# EAGLE board CPC_6502_V1.00 (EAGLE 6.4)
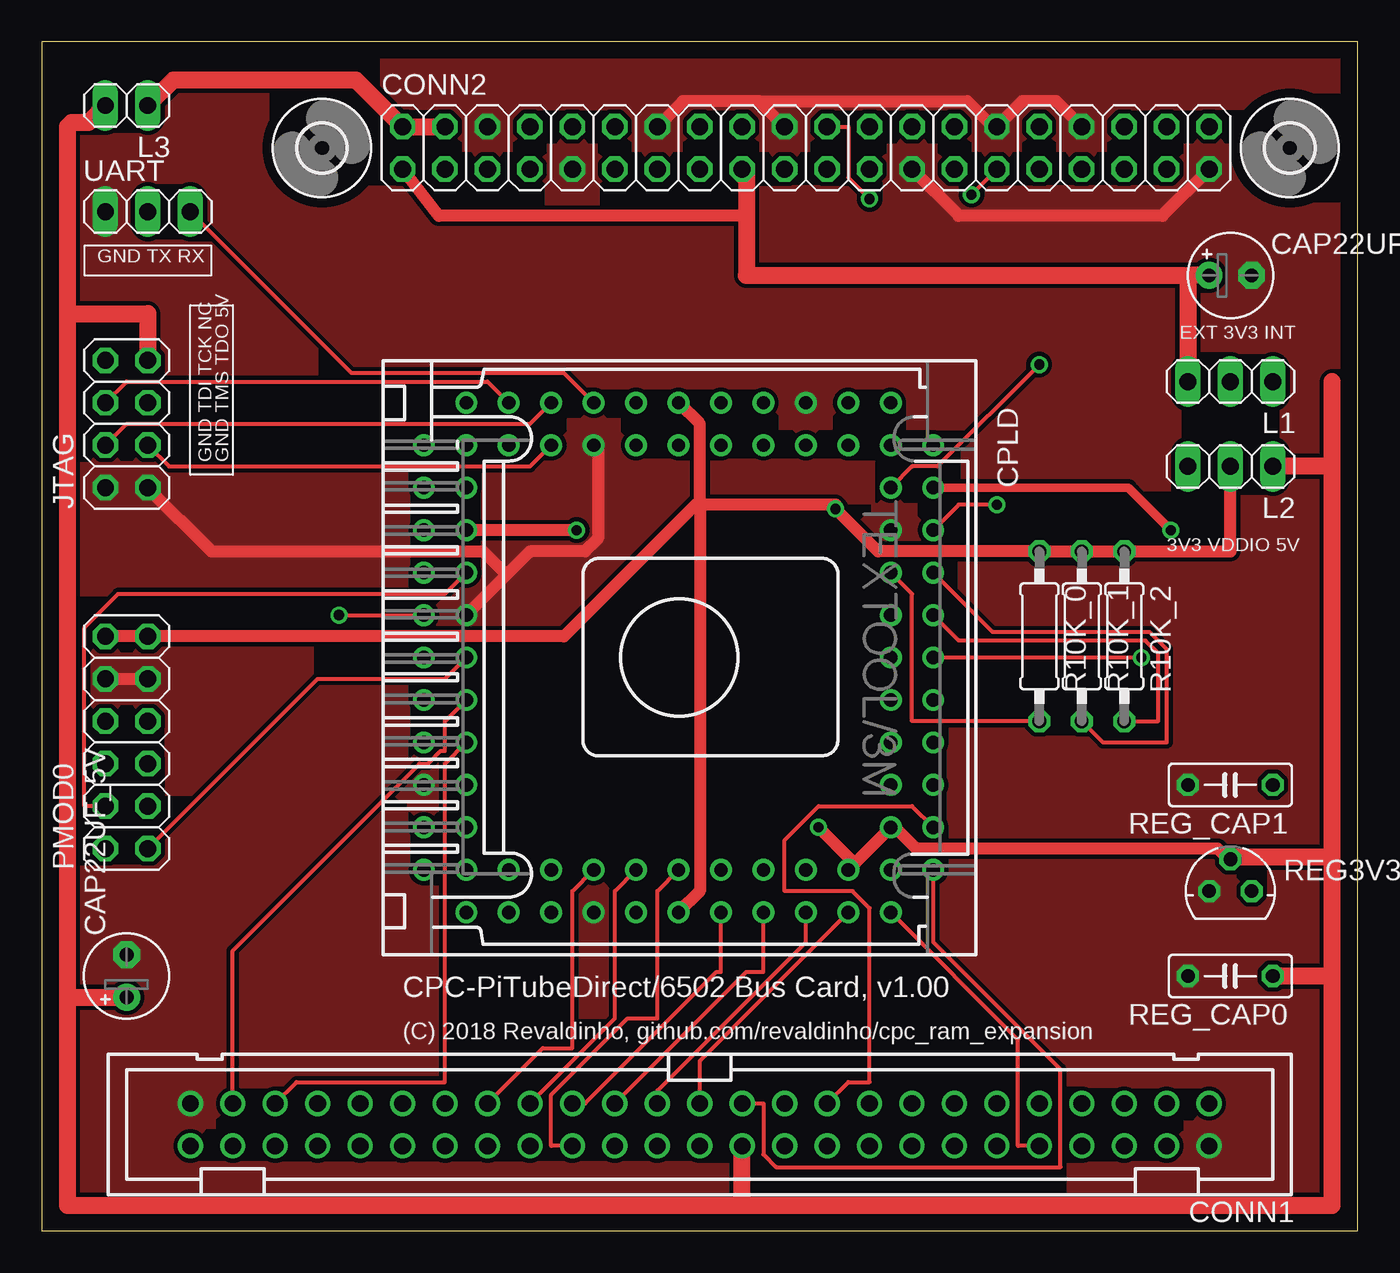
[diagram p0: board, top side]
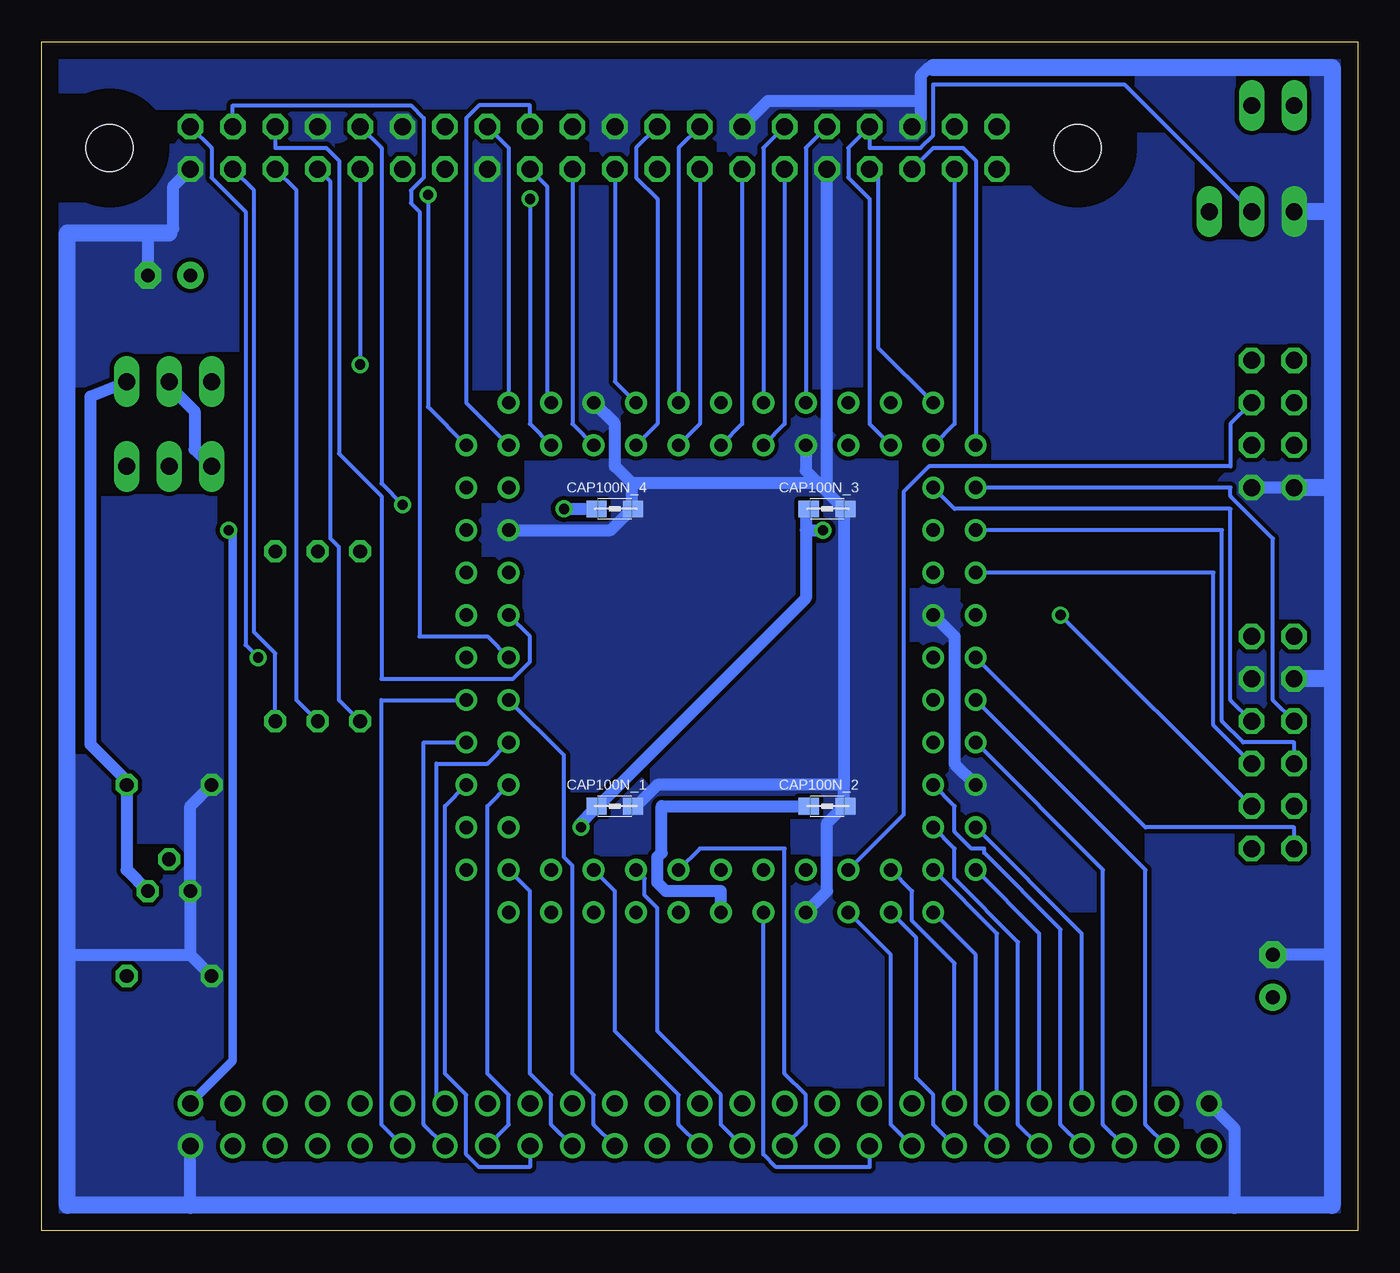
[diagram p1: board, bottom side, seen from below]

Size 78.74 x 71.12 mm. Coordinates in mm from the lower left corner, seen from the top.
Outline: 0,0 78.74,0 78.74,71.12 0,71.12 0,0
Copper layers (1*16): Top 0.035mm / dielectric 1.5mm / Bottom 0.035mm
Design rules "default": minimum track width 10mil, minimum drill 24mil, track to track 8mil, track to pad 8mil, pad to pad 8mil, via to via 8mil, smd to smd 8mil, copper to edge 40mil, drill to drill 8mil, minimum pad ring 10mil, minimum via ring 8mil, stop-mask expansion 4mil, vias tented up to drill 0mil, thermal gap 10mil
Net classes: 0 signal: width 0.254 mm, clearance 0.254 mm; 1 supply: width 0.711 mm, clearance 0.254 mm

## Footprints (pad centres in the part's own frame; a part is rotated, then mirrored left to right if it is on the bottom)
E2,5-5 = drill 0.813 pad 1.6: + -1.27,0 | drill 0.813 pad 1.6 octagon: - 1.27,0
0805 = smd 1.2 x 1: 1 -1.1,0; 2 1.1,0
PAK100/2500-50 = drill 1 pad 1.422: 1 -30.48,-1.27; 2 -30.48,1.27; 3 -27.94,-1.27; 4 -27.94,1.27; 5 -25.4,-1.27; 6 -25.4,1.27; 7 -22.86,-1.27; 8 -22.86,1.27; 9 -20.32,-1.27; 10 -20.32,1.27; 11 -17.78,-1.27; 12 -17.78,1.27; 13 -15.24,-1.27; 14 -15.24,1.27; 15 -12.7,-1.27; 16 -12.7,1.27; 17 -10.16,-1.27; 18 -10.16,1.27; 19 -7.62,-1.27; 20 -7.62,1.27; 21 -5.08,-1.27; 22 -5.08,1.27; 23 -2.54,-1.27; 24 -2.54,1.27; 25 0,-1.27; 26 0,1.27; 27 2.54,-1.27; 28 2.54,1.27; 29 5.08,-1.27; 30 5.08,1.27; 31 7.62,-1.27; 32 7.62,1.27; 33 10.16,-1.27; 34 10.16,1.27; 35 12.7,-1.27; 36 12.7,1.27; 37 15.24,-1.27; 38 15.24,1.27; 39 17.78,-1.27; 40 17.78,1.27; 41 20.32,-1.27; 42 20.32,1.27; 43 22.86,-1.27; 44 22.86,1.27; 45 25.4,-1.27; 46 25.4,1.27; 47 27.94,-1.27; 48 27.94,1.27; 49 30.48,-1.27; 50 30.48,1.27
2X20 = drill 1.016 octagon: 1 -24.13,-1.27; 2 -24.13,1.27; 3 -21.59,-1.27; 4 -21.59,1.27; 5 -19.05,-1.27; 6 -19.05,1.27; 7 -16.51,-1.27; 8 -16.51,1.27; 9 -13.97,-1.27; 10 -13.97,1.27; 11 -11.43,-1.27; 12 -11.43,1.27; 13 -8.89,-1.27; 14 -8.89,1.27; 15 -6.35,-1.27; 16 -6.35,1.27; 17 -3.81,-1.27; 18 -3.81,1.27; 19 -1.27,-1.27; 20 -1.27,1.27; 21 1.27,-1.27; 22 1.27,1.27; 23 3.81,-1.27; 24 3.81,1.27; 25 6.35,-1.27; 26 6.35,1.27; 27 8.89,-1.27; 28 8.89,1.27; 29 11.43,-1.27; 30 11.43,1.27; 31 13.97,-1.27; 32 13.97,1.27; 33 16.51,-1.27; 34 16.51,1.27; 35 19.05,-1.27; 36 19.05,1.27; 37 21.59,-1.27; 38 21.59,1.27; 39 24.13,-1.27; 40 24.13,1.27
284-1273-00-1102JH = drill 0.8 pad 1.27: 1 15.24,0; 2 12.7,0; 3 15.24,2.54; 4 12.7,2.54; 5 15.24,5.08; 6 12.7,5.08; 7 15.24,7.62; 8 12.7,7.62; 9 15.24,10.16; 10 12.7,10.16; 11 15.24,12.7; 12 12.7,15.24; 13 12.7,12.7; 14 10.16,15.24; 15 10.16,12.7; 16 7.62,15.24; 17 7.62,12.7; 18 5.08,15.24; 19 5.08,12.7; 20 2.54,15.24; 21 2.54,12.7; 22 0,15.24; 23 0,12.7; 24 -2.54,15.24; 25 -2.54,12.7; 26 -5.08,15.24; 27 -5.08,12.7; 28 -7.62,15.24; 29 -7.62,12.7; 30 -10.16,15.24; 31 -10.16,12.7; 32 -12.7,15.24; 33 -15.24,12.7; 34 -12.7,12.7; 35 -15.24,10.16; 36 -12.7,10.16; 37 -15.24,7.62; 38 -12.7,7.62; 39 -15.24,5.08; 40 -12.7,5.08; 41 -15.24,2.54; 42 -12.7,2.54; 43 -15.24,0; 44 -12.7,0; 45 -15.24,-2.54; 46 -12.7,-2.54; 47 -15.24,-5.08; 48 -12.7,-5.08; 49 -15.24,-7.62; 50 -12.7,-7.62; 51 -15.24,-10.16; 52 -12.7,-10.16; 53 -15.24,-12.7; 54 -12.7,-15.24; 55 -12.7,-12.7; 56 -10.16,-15.24; 57 -10.16,-12.7; 58 -7.62,-15.24; 59 -7.62,-12.7; 60 -5.08,-15.24; 61 -5.08,-12.7; 62 -2.54,-15.24; 63 -2.54,-12.7; 64 0,-15.24; 65 0,-12.7; 66 2.54,-15.24; 67 2.54,-12.7; 68 5.08,-15.24; 69 5.08,-12.7; 70 7.62,-15.24; 71 7.62,-12.7; 72 10.16,-15.24; 73 10.16,-12.7; 74 12.7,-15.24; 75 15.24,-12.7; 76 12.7,-12.7; 77 15.24,-10.16; 78 12.7,-10.16; 79 15.24,-7.62; 80 12.7,-7.62; 81 15.24,-5.08; 82 12.7,-5.08; 83 15.24,-2.54; 84 12.7,-2.54
2,8 = hole 2.8: 0,0
2X04 = drill 1.016 octagon: 1 -3.81,-1.27; 2 -3.81,1.27; 3 -1.27,-1.27; 4 -1.27,1.27; 5 1.27,-1.27; 6 1.27,1.27; 7 3.81,-1.27; 8 3.81,1.27
1X03 = drill 1.016 long: 1 -2.54,0; 2 0,0; 3 2.54,0
1X02 = drill 1.016 long: 1 -1.27,0; 2 1.27,0
2X06 = drill 1.016 octagon: 1 -6.35,-1.27; 2 -6.35,1.27; 3 -3.81,-1.27; 4 -3.81,1.27; 5 -1.27,-1.27; 6 -1.27,1.27; 7 1.27,-1.27; 8 1.27,1.27; 9 3.81,-1.27; 10 3.81,1.27; 11 6.35,-1.27; 12 6.35,1.27
0207/10 = drill 0.813 octagon: 1 -5.08,0; 2 5.08,0
TO92-3 = drill 0.813 octagon: A1 -1.27,0; A2 1.27,0; G 0,1.905
C050-025X075 = drill 0.813 octagon: 1 -2.54,0; 2 2.54,0

## Placement (x,y rotation side)
CAP22UF_5V  [E2,5-5]  5.08,15.24 90 top
CAP22UF_IO  [E2,5-5]  71.12,57.15 0 top
CAP100N_1  [0805]  44.45,25.4 180 bottom
CAP100N_2  [0805]  31.75,25.4 180 bottom
CAP100N_3  [0805]  31.75,43.18 180 bottom
CAP100N_4  [0805]  44.45,43.18 180 bottom
CONN1  [PAK100/2500-50]  39.37,6.35 180 top
CONN2  [2X20]  45.72,64.77 0 top
CPLD  [284-1273-00-1102JH]  38.1,34.29 0 top
H1  [2,8]  74.68,64.77 0 top
H2  [2,8]  16.76,64.77 0 top
JTAG  [2X04]  5.08,48.26 90 top
L1  [1X03]  71.12,50.8 180 top
L2  [1X03]  71.12,45.72 180 top
L3  [1X02]  5.08,67.31 180 top
PMOD0  [2X06]  5.08,29.21 90 top
R10K_0  [0207/10]  59.69,35.56 270 top
R10K_1  [0207/10]  62.23,35.56 270 top
R10K_2  [0207/10]  64.77,35.56 270 top
REG3V3  [TO92-3]  71.12,20.32 0 top
REG_CAP0  [C050-025X075]  71.12,15.24 180 top
REG_CAP1  [C050-025X075]  71.12,26.67 180 top
UART  [1X03]  6.35,60.96 0 top

## Library data of the parts
CAP22UF_5V CAP22UF_IO R10K_0 R10K_1 R10K_2 REG_CAP0 REG_CAP1 = resistor
CAP100N_1-CAP100N_4 = wuerth-elektronik
CONN1 CPLD = con-3m
CONN2 JTAG L1-L3 PMOD0 UART = pinhead
H1 H2 = holes
REG3V3 = triac

## Nets
A0: CONN1.33 CPLD.63
A1: CONN1.34 CPLD.62
A2: CONN1.35 CPLD.61
A3: CONN1.36 CPLD.58
A4: CONN1.37 CPLD.57
A5: CONN1.38 CPLD.56
A6: CONN1.39 CPLD.55
A7: CONN1.40 CPLD.54
A8: CONN1.41 CPLD.53
A9: CONN1.42 CPLD.52
A10: CONN1.43 CPLD.51
A11: CONN1.44 CPLD.50
A12: CONN1.45 CPLD.48
A13: CONN1.46 CPLD.47
A14: CONN1.47 CPLD.46
A15: CONN1.48 CPLD.45
BUSACK_B: CONN1.13 CPLD.82
BUSRESET_B: CONN1.11
BUSRQ_B: CONN1.14 CPLD.81
CLK: CONN1.1 CPLD.9
CURSOR: CONN1.5
D0: CONN1.25 CPLD.72
D1: CONN1.26 CPLD.71
D2: CONN1.27 CPLD.70
D3: CONN1.28 CPLD.69
D4: CONN1.29 CPLD.68
D5: CONN1.30 CPLD.67
D6: CONN1.31 CPLD.66
D7: CONN1.32 CPLD.65
EXP_B: CONN1.3
HALT_B: CONN1.17
INT_B: CONN1.16 CPLD.80
IOREQ_B: CONN1.20 CPLD.76
LPEN: CONN1.4
M1_B: CONN1.22 CPLD.84
MREQ_B: CONN1.23 CPLD.75
NMI_B: CONN1.15
PI_GPIO_02: CONN2.3 CPLD.34
PI_GPIO_03: CONN2.5 CPLD.33
PI_GPIO_04: CONN2.7 CPLD.32
PI_GPIO_05: CONN2.29 CPLD.11
PI_GPIO_06: CONN2.31 CPLD.10
PI_GPIO_07: CONN2.26 CPLD.12
PI_GPIO_08: CONN2.24 CPLD.13
PI_GPIO_09: CONN2.21 CPLD.17
PI_GPIO_10: CONN2.19 CPLD.18
PI_GPIO_11: CONN2.23 CPLD.14
PI_GPIO_12: CONN2.32 CPLD.7
PI_GPIO_13: CONN2.33 CPLD.6 R10K_0.2
PI_GPIO_14: CONN2.8 CPLD.31 UART.2
PI_GPIO_15: CONN2.10 CPLD.26 UART.3
PI_GPIO_16: CONN2.36 CPLD.4
PI_GPIO_17: CONN2.11 CPLD.25
PI_GPIO_18: CONN2.12 CPLD.24
PI_GPIO_19: CONN2.35 CPLD.5 R10K_1.2
PI_GPIO_20: CONN2.38 CPLD.2
PI_GPIO_21: CONN2.40 CPLD.1
PI_GPIO_22: CONN2.15 CPLD.21
PI_GPIO_23: CONN2.16 CPLD.20
PI_GPIO_24: CONN2.18 CPLD.19
PI_GPIO_25: CONN2.22 CPLD.15
PI_GPIO_26: CONN2.37 CPLD.3 R10K_2.2
PI_GPIO_27: CONN2.13 CPLD.23
PMOD_GPIO_0: CPLD.44 PMOD0.1
PMOD_GPIO_1: CPLD.43 PMOD0.2
PMOD_GPIO_2: CPLD.41 PMOD0.3
PMOD_GPIO_3: CPLD.40 PMOD0.4
PMOD_GPIO_4: CPLD.39 PMOD0.5
PMOD_GPIO_5: CPLD.37 PMOD0.6
PMOD_GPIO_6: CPLD.36 PMOD0.7
PMOD_GPIO_7: CPLD.35 PMOD0.8
RAMDIS: CONN1.6
RAMRD_B: CONN1.7
RD_B: CONN1.19 CPLD.77
READY: CONN1.12 CPLD.83
RESET_B: CONN1.10 CPLD.74
RFSH_B: CONN1.21
ROMDIS: CONN1.8
ROMEN_B: CONN1.9
SOUND: CONN1.50
TCK: CPLD.30 JTAG.6
TDI: CPLD.28 JTAG.4
TDO: CPLD.59 JTAG.5
TMS: CPLD.29 JTAG.3
VDD [supply]: CAP22UF_5V.+ CAP100N_1.2 CAP100N_3.2 CONN1.24 CPLD.38 CPLD.73 CPLD.78 JTAG.7 L2.1 L3.2 REG3V3.G REG_CAP0.1
VDD_3V3 [supply]: L1.2 L2.3
VDD_3V3_EXT [supply]: CAP22UF_IO.+ CONN2.1 CONN2.17 L1.3
VDD_3V3_REG [supply]: L1.1 REG3V3.A2 REG_CAP1.1
VDD_IO [supply]: CAP100N_2.2 CAP100N_4.2 CPLD.22 CPLD.64 L2.2 PMOD0.11 PMOD0.12 R10K_0.1 R10K_1.1 R10K_2.1
VDD_PI [supply]: CONN2.2 CONN2.4 L3.1
VSS [supply]: CAP22UF_5V.- CAP22UF_IO.- CAP100N_1.1 CAP100N_2.1 CAP100N_3.1 CAP100N_4.1 CONN1.2 CONN1.49 CONN2.6 CONN2.9 CONN2.14 CONN2.20 CONN2.25 CONN2.30 CONN2.34 CONN2.39 CPLD.8 CPLD.16 CPLD.27 CPLD.42 CPLD.49 CPLD.60 JTAG.1 JTAG.2 PMOD0.9 PMOD0.10 REG3V3.A1 REG_CAP0.2 REG_CAP1.2 UART.1
WR_B: CONN1.18 CPLD.79

## Tracks (layer width: path | path; a pad name or v marks a point on that pad's centre or on a via)
A0
  Top 0.254: CPLD.63 34.29,20.32 34.29,12.7 CONN1.33
A1
  Bottom 0.254: CPLD.62 35.56,4.57 34.8,3.81 29.21,3.81 CONN1.34
A2
  Top 0.254: CPLD.61 31.75,20.32 31.75,10.92 29.97,10.92 CONN1.35
A3
  Bottom 0.254: CPLD.58 27.94,16.51 27.94,6.35 CONN1.36
A4
  Bottom 0.254: CPLD.57 26.67,20.32 26.67,18.54 24.13,16 CONN1.37
A5
  Bottom 0.254: CPLD.56 26.42,17.53 26.42,9.14 25.4,8.13 25.4,6.35 CONN1.38
A6
  Bottom 0.254: CPLD.55 21.59,17.78 CONN1.39
A7
  Bottom 0.254: CPLD.54 22.86,16.51 22.86,6.35 CONN1.40
A8
  Bottom 0.254: CPLD.53 19.05,17.78 CONN1.41
A9
  Bottom 0.254: CPLD.52 24.13,22.86 24.13,21.08 20.32,17.27 20.32,6.35 CONN1.42
A10
  Bottom 0.254: CPLD.51 16.51,17.78 CONN1.43
A11
  Bottom 0.254: CPLD.50 24.13,25.4 24.13,23.88 23.11,22.86 22.35,22.86 22.35,22.61 17.78,18.03 17.78,6.35 CONN1.44
A12
  Top 0.254: CPLD.48 24.13,27.94 24.13,8.89 15.24,8.89 CONN1.45
A13
  Bottom 0.254: CPLD.47 15.24,21.59 15.24,6.35 CONN1.46
A14
  Top 0.254: CPLD.46 24.13,30.48 24.13,28.7 23.88,28.7 23.11,27.94 22.61,27.94 11.43,16.76 CONN1.47
A15
  Bottom 0.254: CPLD.45 12.7,21.59 12.7,6.35 CONN1.48
BUSACK_B
  Bottom 0.254: CPLD.82 52.07,27.94 55.12,27.94 55.12,8.13 CONN1.13
BUSRQ_B
  Bottom 0.254: CPLD.81 55.88,29.21 55.88,6.35 CONN1.14
CLK  (via drill 0.61)
  Top 0.508: CPLD.9 65.02,44.45 v67.56,41.91
  Bottom 0.254: 67.31,41.66 v67.56,41.91
  Bottom 0.508: 67.31,41.66 67.31,10.16 CONN1.1
D0
  Top 0.254: CPLD.72 39.37,10.16 CONN1.25
D1
  Bottom 0.254: CPLD.71 44.45,20.32 44.45,11.94 40.64,8.13 40.64,6.35 CONN1.26
D2
  Top 0.254: CPLD.70 45.72,17.27 36.83,8.38 CONN1.27
D3
  Bottom 0.254: CPLD.69 42.67,21.08 42.67,20.07 41.91,19.3 41.91,11.94 38.1,8.13 38.1,6.35 CONN1.28
D4
  Top 0.254: CPLD.68 43.18,15.49 42.16,15.49 CONN1.29
D5
  Bottom 0.254: CPLD.67 39.37,22.86 34.29,22.86 34.29,9.4 33.02,8.13 33.02,6.35 CONN1.30
D6
  Top 0.254: CPLD.66 40.64,15.49 40.39,15.49 32.51,7.62 CONN1.31
D7
  Top 0.254: CPLD.65 36.83,20.32 36.83,12.7 35.05,12.7 30.48,8.13 30.48,5.08 CONN1.32
INT_B
  Bottom 0.254: CPLD.80 52.07,25.4 52.07,9.4 50.8,8.13 50.8,6.35 CONN1.16
IOREQ_B
  Bottom 0.254: CPLD.76 49.53,20.32 49.53,9.4 48.26,8.13 48.26,6.35 CONN1.20
M1_B
  Bottom 0.254: CPLD.84 47.5,28.45 47.5,22.35 46.99,21.84 46.99,9.4 45.72,8.13 45.72,6.35 CONN1.22
MREQ_B
  Top 0.254: CPLD.75 53.34,17.27 60.96,9.65 60.96,3.81 43.94,3.81 43.18,4.57 43.18,7.62 CONN1.23
PI_GPIO_02
  Bottom 0.254: CPLD.34 24.13,48.26 CONN2.3
PI_GPIO_03
  Bottom 0.254: CPLD.33 22.86,64.01 23.62,64.77 25.4,64.77 CONN2.5
PI_GPIO_04
  Bottom 0.254: CPLD.32 28.7,52.83 28.7,62.99 CONN2.7
PI_GPIO_05  (via drill 0.61)
  Top 0.254: CONN2.29 v55.63,61.98
  Bottom 0.254: CPLD.11 55.63,49.28 v55.63,61.98
PI_GPIO_06  (via drill 0.61)
  Top 0.254: CPLD.10 52.07,45.72 53.59,45.72 v59.69,51.82
  Bottom 0.254: CONN2.31 v59.69,51.82
PI_GPIO_07
  Bottom 0.254: CPLD.12 50.8,64.77 CONN2.26
PI_GPIO_08
  Bottom 0.254: CPLD.13 53.34,49.53 53.34,66.55 52.58,67.31 49.53,67.31 CONN2.24
PI_GPIO_09
  Bottom 0.254: CPLD.17 46.99,48.26 CONN2.21
PI_GPIO_10
  Bottom 0.254: CPLD.18 44.45,50.8 CONN2.19
PI_GPIO_11
  Bottom 0.254: CPLD.14 48.51,49.78 48.51,62.48 CONN2.23
PI_GPIO_12  (via drill 0.61)
  Top 0.254: CPLD.7 54.86,43.43 v57.15,43.43
  Bottom 0.254: v57.15,43.43 58.42,44.7 58.42,64.77 CONN2.32
PI_GPIO_13
  Top 0.254: CPLD.6 52.07,38.1 52.07,30.48 R10K_0.2
  Bottom 0.254: CONN2.33 61.47,62.74 61.47,41.4 60.96,40.89 60.96,31.75 R10K_0.2
PI_GPIO_14
  Bottom 0.254: CPLD.31 29.21,48.26 29.21,61.72 30.48,62.99 30.48,64.77 CONN2.8 29.21,64.77 26.16,64.77 25.4,65.53 25.4,68.58 13.97,68.58 UART.2
PI_GPIO_15
  Top 0.254: UART.3 18.54,51.31 31.24,51.31 CPLD.26
  Bottom 0.254: CPLD.26 33.02,64.77 CONN2.10
PI_GPIO_16
  Bottom 0.254: CPLD.4 49.53,35.56 49.53,34.04 50.55,33.02 58.42,33.02 58.42,43.94 60.96,46.48 60.96,64.01 61.72,64.77 64.77,64.77 CONN2.36
PI_GPIO_17
  Bottom 0.254: CPLD.25 34.29,48.26 CONN2.11
PI_GPIO_18
  Bottom 0.254: CPLD.24 35.56,64.77 CONN2.12
PI_GPIO_19
  Top 0.254: CPLD.5 56.9,35.81 66.29,35.81 67.31,34.8 67.31,29.21 63.5,29.21 R10K_1.2
  Bottom 0.254: CONN2.35 63.5,62.23 63.5,31.75 R10K_1.2
PI_GPIO_20
  Bottom 0.254: CPLD.2 52.07,35.56 56.13,35.56 56.13,60.96 56.64,61.47 56.64,62.23 55.88,62.99 55.88,66.55 56.64,67.31 67.31,67.31 CONN2.38
PI_GPIO_21  (via drill 0.61)
  Top 0.254: v65.79,34.29 CPLD.1
  Bottom 0.254: v65.79,34.29 66.55,35.05 66.55,60.96 68.58,62.99 68.58,64.77 CONN2.40
PI_GPIO_22
  Bottom 0.254: CPLD.21 39.37,48.26 CONN2.15
PI_GPIO_23
  Bottom 0.254: CPLD.20 40.64,64.77 CONN2.16
PI_GPIO_24
  Bottom 0.254: CPLD.19 41.91,48.26 41.91,61.72 43.18,62.99 43.18,64.77 CONN2.18
PI_GPIO_25  (via drill 0.61)
  Top 0.254: v49.53,61.72 48.26,62.99 48.26,66.04 CONN2.22
  Bottom 0.254: CPLD.15 49.53,48.26 v49.53,61.72
PI_GPIO_26
  Top 0.254: CPLD.3 54.86,35.31 66.04,35.31 66.8,34.54 66.8,30.48 R10K_2.2
  Bottom 0.254: CONN2.37 66.04,62.23 66.04,35.81 64.77,34.54 R10K_2.2
PI_GPIO_27
  Bottom 0.254: CPLD.23 36.83,48.26 CONN2.13
PMOD_GPIO_0
  Top 0.254: CPLD.44 24.13,33.02 16.51,33.02 PMOD0.1
PMOD_GPIO_1
  Bottom 0.254: CPLD.43 12.7,24.13 3.81,24.13 PMOD0.2
PMOD_GPIO_2  (via drill 0.61)
  Top 0.254: v17.78,36.83 CPLD.41
  Bottom 0.254: PMOD0.3 v17.78,36.83
PMOD_GPIO_3
  Top 0.254: CPLD.40 24.13,38.1 4.57,38.1 2.54,36.07 2.54,25.4 PMOD0.4
PMOD_GPIO_4
  Bottom 0.254: CPLD.39 8.64,39.37 8.64,30.23 PMOD0.5
PMOD_GPIO_5
  Bottom 0.254: CPLD.37 8.13,41.91 8.13,30.48 6.86,29.21 3.81,29.21 PMOD0.6
PMOD_GPIO_6
  Bottom 0.254: CPLD.36 24.13,43.18 7.62,43.18 7.62,31.75 PMOD0.7
PMOD_GPIO_7
  Bottom 0.254: CPLD.35 7.62,44.45 7.62,43.94 5.08,41.4 5.08,31.75 PMOD0.8
RD_B
  Top 0.254: CPLD.77 52.07,25.4 46.48,25.4 44.45,23.37 44.45,20.32 48.51,20.32 49.53,19.3 49.53,8.89 48.26,8.89 CONN1.19
READY
  Bottom 0.254: CPLD.83 58.42,31.75 58.42,6.35 CONN1.12
RESET_B
  Top 0.254: CPLD.74 58.42,11.43 58.42,5.08 CONN1.10
TCK
  Top 0.254: CPLD.30 26.67,50.8 5.08,50.8 JTAG.6
TDI
  Top 0.254: CPLD.28 29.21,48.26 5.08,48.26 JTAG.4
TDO
  Bottom 0.254: CPLD.59 27.18,24.89 27.18,44.2 25.65,45.72 7.62,45.72 7.62,48.26 JTAG.5
TMS
  Top 0.254: CPLD.29 29.21,45.72 7.62,45.72 JTAG.3
VDD  (via drill 0.61)
  Top 0.711: v32,41.91 CPLD.38 | 71.12,22.35 REG3V3.G 70.87,22.35 70.36,22.86 52.32,22.86 51.05,24.13 CPLD.78 CPLD.73 48.51,22.1 v46.48,24.13 | 1.78,66.29 1.52,66.04
  Top 1.016: 41.91,1.52 1.52,1.52 1.52,13.97 | 41.91,1.52 77.22,1.52 77.22,15.24 | 77.22,15.24 77.22,22.35 | 77.22,22.35 77.22,45.72 | 77.22,45.72 77.22,50.8 | 1.52,66.04 1.52,54.86 | 1.52,54.86 1.52,13.97 | 77.22,15.24 REG_CAP0.1 | 77.22,22.35 71.12,22.35 | 41.91,1.52 CONN1.24 | JTAG.7 6.35,54.86 1.52,54.86 | L3.2 2.79,66.29 1.78,66.29 | 77.22,45.72 L2.1 | 1.52,13.97 CAP22UF_5V.+
  Bottom 0.711: 33.02,41.91 33.02,43.18 CAP100N_3.2 | 33.02,41.91 33.02,37.85 45.47,25.4 CAP100N_1.2 45.72,25.15 46.48,24.38 v46.48,24.13 | 33.02,41.91 v32,41.91
VDD_3V3
  Bottom 0.711: L2.3 69.6,46.74 69.6,49.02 71.12,50.55 L1.2
VDD_3V3_EXT
  Top 0.711: CONN2.1 23.75,60.71 42.29,60.71 CONN2.17 42.16,63.5 | 68.33,57.15 68.58,57.15
  Top 1.016: L1.3 68.58,57.15 CAP22UF_IO.+ | 68.33,57.15 42.16,57.15 42.16,63.5
VDD_3V3_REG
  Bottom 0.711: REG3V3.A2 73.66,21.59 REG_CAP1.1 73.66,26.92 75.82,29.08 75.82,49.91 L1.1
VDD_IO  (via drill 0.61)
  Top 0.711: PMOD0.12 PMOD0.11 31.24,35.56 39.12,43.43 39.37,43.43 | CPLD.22 39.37,48.26 39.37,43.43 | 39.37,43.43 47.5,43.43 v47.5,43.18 50.04,40.64 R10K_0.1 R10K_1.1 R10K_2.1 71.12,40.64 L2.2 | CPLD.64 39.37,20.32 39.37,43.43
  Bottom 0.711: CAP100N_2.2 41.66,25.4 41.66,22.61 41.91,22.35 41.91,20.83 41.4,20.32 38.1,20.32 CPLD.64 | v47.5,43.18 CAP100N_4.2
VDD_PI
  Top 1.016: L3.1 7.87,68.83 18.8,68.83 CONN2.2 CONN2.4
VSS
  Top 0.711: 27.81,39.24 29.21,40.64 32.51,40.64 33.27,41.4 33.27,46.99 CPLD.27 | 27.81,39.24 CPLD.42 | CONN2.34 60.71,67.56 58.67,67.56 CONN2.30 56.9,66.04 55.37,67.56 42.93,67.56 | CONN2.14 38.35,67.56 42.93,67.56 | CONN2.20 42.93,67.56 | CONN2.25 54.86,60.71 67.06,60.71 CONN2.39 | PMOD0.10 PMOD0.9 | 27.81,39.24 26.42,40.64 10.16,40.64 JTAG.1
  Bottom 0.711: CPLD.60 31.75,20.32 31.75,24.38 30.73,25.4 CAP100N_2.1 30.73,25.65 30.73,26.67 | 30.73,26.67 41.91,26.67 43.18,25.4 CAP100N_1.1 | CPLD.8 44.7,41.91 43.43,43.18 CAP100N_4.1 43.43,43.43 43.43,44.7 | CPLD.16 44.45,48.26 44.45,45.72 43.43,44.7 | CPLD.49 24.13,27.94 24.13,35.56 CPLD.42 | 32.38,44.83 33.02,45.47 CPLD.27 | 32.38,44.83 31.88,44.32 | 31.88,44.32 30.73,43.18 CAP100N_3.1 30.73,42.93 30.73,26.67 | CONN2.9 31.75,44.45 31.88,44.32 | 43.43,44.7 32.51,44.7 32.38,44.83 | 69.85,16.51 REG_CAP0.2 | 69.85,16.51 REG3V3.A1 69.85,25.4 REG_CAP1.2 | CONN1.49 7.37,6.1 7.37,1.52 | 69.85,1.52 CONN1.2 | JTAG.2 JTAG.1 | CONN2.6 26.16,66.55 26.16,67.56 | 26.16,67.56 26.16,69.09 25.65,69.6 25.4,69.6 | 1.52,16.51 CAP22UF_5V.- | 72.39,59.69 CAP22UF_IO.- | 77.22,16.51 69.85,16.51 | CONN2.39 70.87,62.48 70.87,59.94 71.12,59.69 | CONN2.14 35.31,67.56 26.16,67.56
  Bottom 1.016: 71.12,59.69 72.39,59.69 77.22,59.69 77.22,16.51 77.22,1.52 69.85,1.52 7.37,1.52 1.52,1.52 1.52,16.51 1.52,33.02 | 25.4,69.6 1.52,69.6 1.52,60.96 | 1.52,60.96 1.52,44.45 | 1.52,44.45 1.52,33.02 | 1.52,33.02 PMOD0.10 | 1.52,44.45 JTAG.2 | 1.52,60.96 UART.1
  pour Top: 0,0 0,71.12 78.74,71.12 78.74,0
  pour Bottom: 0,0 0,71.12 78.74,71.12 78.74,0
WR_B
  Bottom 0.254: CPLD.79 54.61,25.4 54.61,9.4 53.34,8.13 53.34,4.57 52.58,3.81 49.53,3.81 CONN1.18

## Text on the board
tPlace: GND TX RX | EXT 3V3 INT | GND TDI TCK NC | GND TMS TDO 5V | 3V3 VDDIO 5V | CPC-PiTubeDirect/6502 Bus Card, v1.00 | (C) 2018 Revaldinho, github.com/revaldinho/cpc_ram_expansion